# Altium PCB LAY-90818_A.brd.PcbDoc (part 5 of 6)
Units mil, origin at the board's own origin, x right, y up, seen from the top; angles counter-clockwise.
Board outline 4645.67 x 2165.35 mil, 4 copper layers (TOP, GND, POWER, BOTTOM), stack 60.45 mil thick; 414 components, 348 nets, 1441 pads, 720 vias.
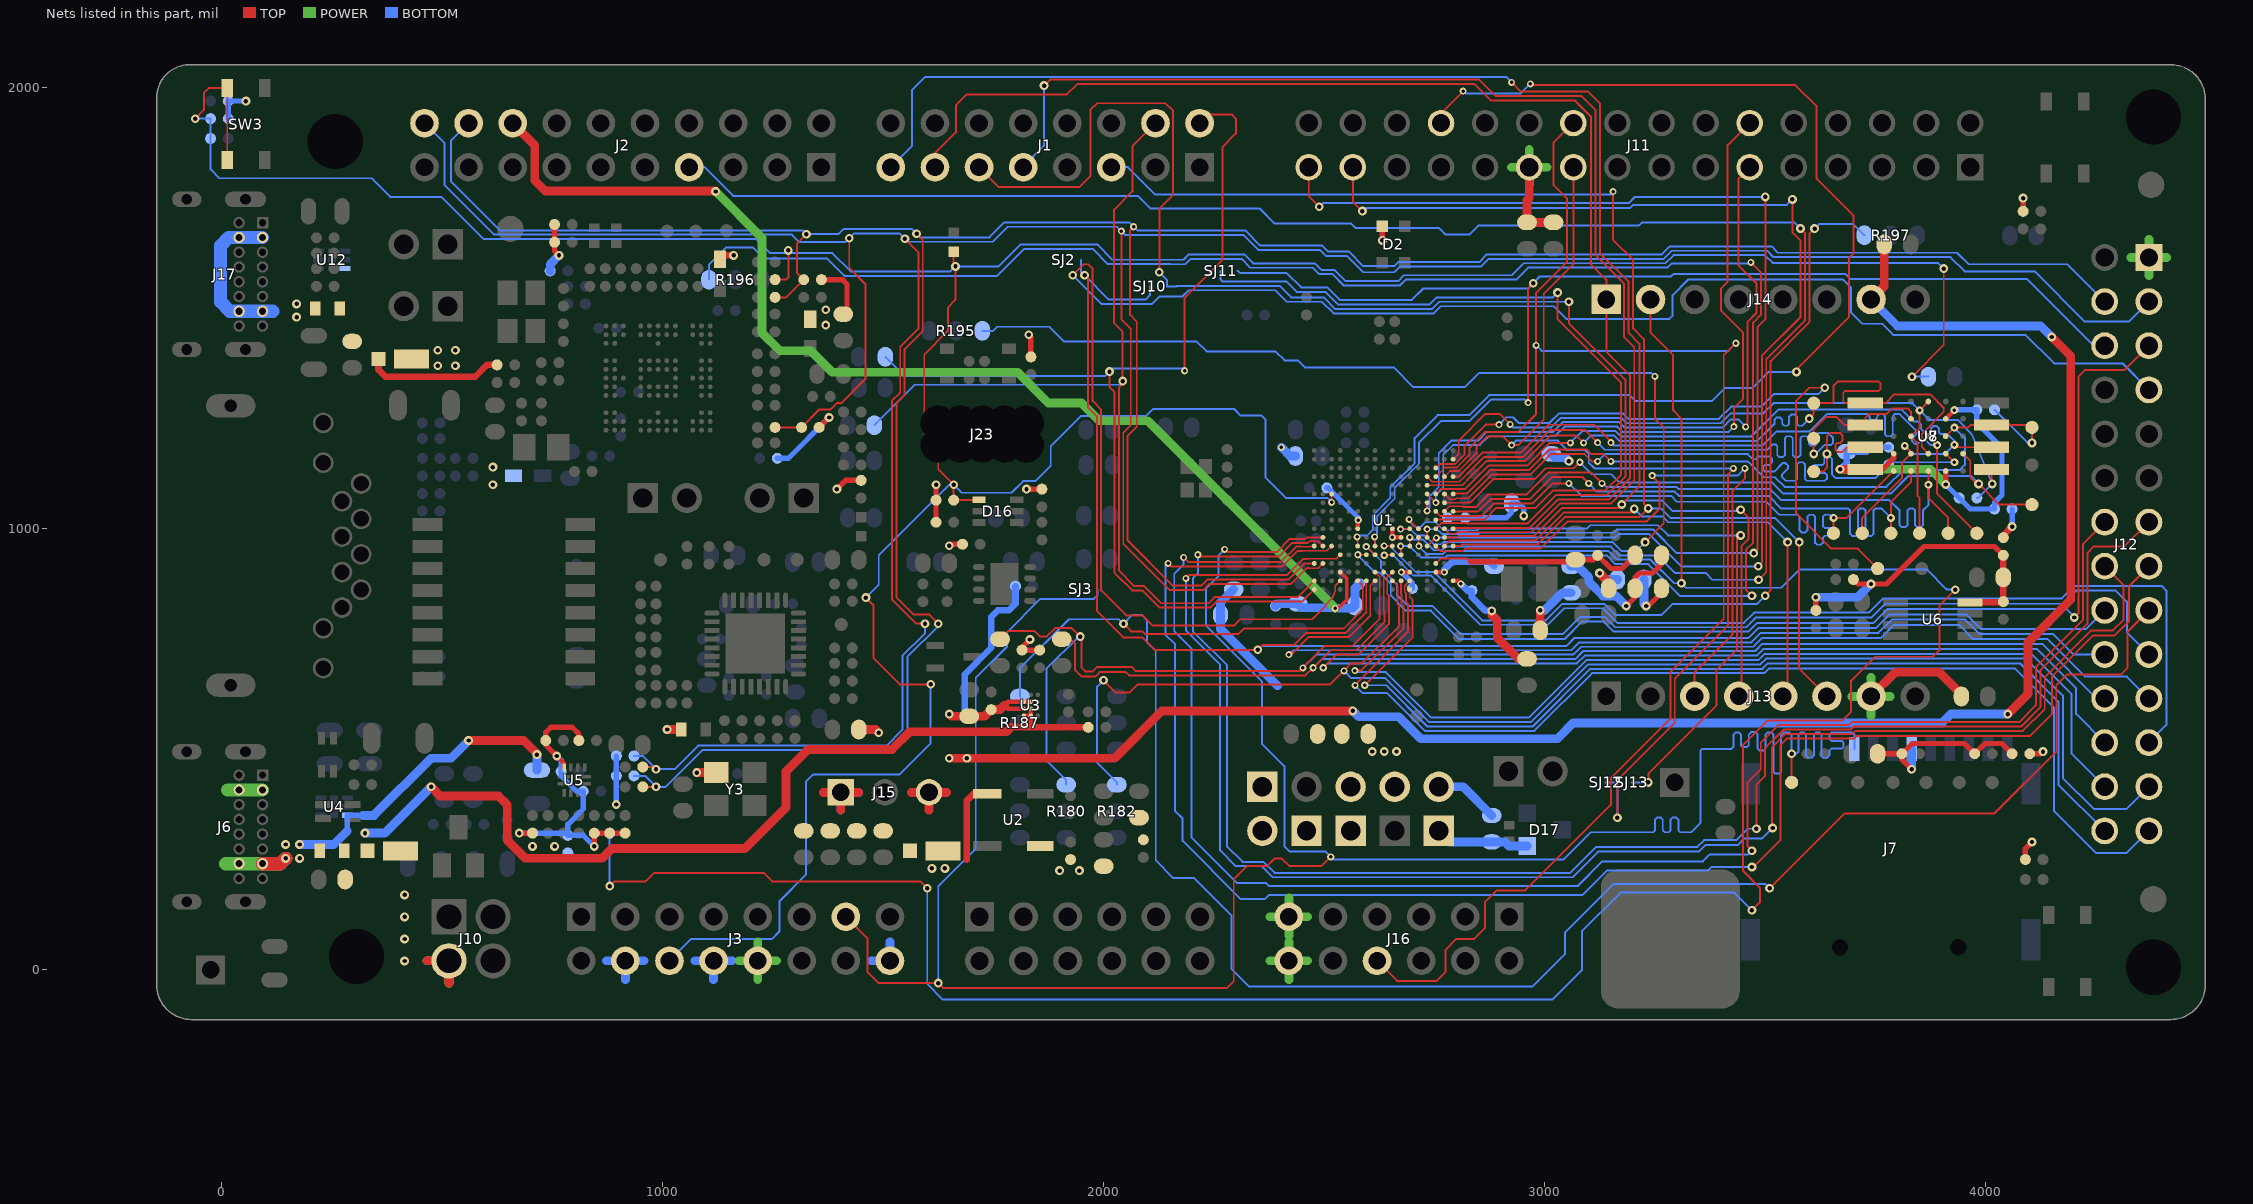
[diagram p7: the nets of this part, all layers, seen from the top]

## Via types
v1: diameter 20, hole 10, TOP to BOTTOM, 483 vias
v2: diameter 16, hole 8, TOP to BOTTOM, 215 vias
v3: diameter 18, hole 8, TOP to BOTTOM, 13 vias
v4: diameter 20, hole 10.1, TOP to BOTTOM, 9 vias

## Nets (pads, with @x,y where several pads share a name; then routed paths per layer and width w, separated by ;. In a path a pad name is that pad's centre, name@x,y a point inside that pad or via, vN(x,y) a via of type N, cw(c..) or ccw(c..) an arc to the next point about the centre after c; other vN are vias at no path point) (continued)
P2_7/PWM1_B0: J3.13 J7.1 SJ3.3 TP23.1 U1.L2 | length 6002.2
  TOP w4: 2445,977 2457,977 2460.63,980.63 U1.L2@2497.2,980.63
  TOP w4.4: J3.13@1415.5,120.5 1465,71 1465,-5 1490,-30 v1(1625,-30) 1636,-41 2279.86,-41 2295,-25.86 2295,205 2325,235 2370,235 2387.4,252.4 2404.31,252.4 2421.71,235 2493.8,235 v2(2515,256.2) ; v2(2274.43,953.2) 2275.29,953.2 2281.49,947 2392,947 2422,977 2445,977 ; TP23.1@3560,425 v1(3560,490)
  BOTTOM w4.4: v1(1625,-30) 1625,189.14 1710,274.14 1710,662.22 1781,733.22 1781,765.56 1856.44,841 1978,841 1986.5,849.5 SJ3.3@1986.5,864 ; v2(2274.43,953.2) 2260,938.77 2260,892.5 2232.5,865 2232.5,780.56 2359.02,654.03 2359.02,512.98 2410,462 2410,280 2422,268 2503.2,268 v2(2515,256.2) 2521.2,250 3042.51,250 3104.51,312 3245.83,312 3250.23,316.4 3250.23,340.6 3254.63,345 3263.43,345 3267.83,340.6 3267.83,316.4 3272.23,312 3281.03,312 3285.43,316.4 3285.43,340.6 3289.83,345 3298.63,345 3303.03,340.6 3303.03,316.4 3307.43,312 3332.74,312 3353.2,332.46 3353.2,496.6 3357.6,501 3423.6,501 3428,505.4 3428,533.6 3432.4,538 3440.79,538 3445.19,533.6 3445.19,509.4 3449.59,505 3458.39,505 3462.79,509.4 3462.79,533.6 3468.19,539 3478.68,539 3483.08,534.6 3483.08,501.4 3487.48,497 3496.28,497 3500.68,501.4 3500.68,533.6 3505.08,538 3514.4,538 3518.8,533.6 3518.8,449.4 3523.2,445 3532,445 3536.4,449.4 3536.4,532.6 3541.8,538 3555.6,538 3560,533.6 v1(3560,490) 3570.94,490 3575.34,494.4 3575.34,533.6 3579.74,538 3588.54,538 3592.94,533.6 3592.94,485.34 3597.34,480.94 3605.14,480.94 3610.54,486.34 3610.54,533.6 3614.94,538 3623.74,538 3628.14,533.6 3628.14,485.34 3632.54,480.94 3640.34,480.94 3645.74,486.34 3645.74,497.23 3650.14,501.63 3673.6,501.63 3678,506.03 3678,514.83 3673.6,519.23 3650.14,519.23 3645.74,523.63 3645.74,533.6 3650.14,538 3697.73,538 3702.13,533.6 J7.1@3702.13,500.94
P2_8/FXIO_D16-FXIO_HDR: J12.13 U1.M2 | length 3684.4
  TOP w4: 2445,968 2463,968 2466.64,971.64 2486.5,971.64 U1.M2@2497.2,960.94
  TOP w4.4: v2(2213.8,941.2) 2218,937 2397,937 2428,968 2445,968 ; v1(3480,320) 3480,420 3500,440 3500,503.29 3541.71,545 3694.14,545 3700.94,551.8 4080.24,551.8 4124,595.56 4124,679 4231,786 4231,946 4245,960 4314.76,960 J12.13@4370,1015.24
  BOTTOM w4.4: v2(2213.8,941.2) 2213.8,898.8 2202.5,887.5 2202.5,768.13 2279.32,691.31 2279.32,280.68 2315,245 2362.43,245 2387.43,220 3057.77,220 3116.77,279 3346.41,279 3361.41,294 3434.66,294 3460.66,320 v1(3480,320)
P2_9/FXIO_D17-FXIO_HDR: J12.14 U1.M1 | length 3725.2
  TOP w4: 2447.96,959.5 2469.5,959.5 2470.94,960.94 U1.M1@2477.52,960.94
  TOP w4.4: v2(2181.4,935) 2191.4,925 2401.82,925 2436.32,959.5 2447.96,959.5 ; v1(3470,270) 3460,280 3460,425 3490,455 3490,515 3529.99,555 3690,555 3696.8,561.8 4076.09,561.8 4114,599.71 4114,686.43 4221,793.43 4221,966.24 J12.14@4270,1015.24
  BOTTOM w4.4: v2(2181.4,935) 2181.4,919.65 2160.1,898.35 2160.1,768.1 2198.93,729.26 2198.93,300.78 2302.92,196.8 2368.2,196.8 2375,190 3074.44,190 3130.44,246 3358.67,246 3374.67,262 3462,262 v1(3470,270)
P2_10/FXIO_D18-FXIO_HDR: J12.15 U1.M3 | length 3820.7
  TOP w4: 2451.43,950.24 2506.19,950.24 U1.M3@2516.89,960.94
  TOP w4.4: v2(2146.3,921.61) 2152.91,915 2404.54,915 2439.78,950.24 2451.43,950.24 ; v1(3470,233.2) 3473.2,233.2 3535,295 3535,510 3550,525 3702.43,525 3707.43,530 4100,530 4150,580 4150,665 4243,758 4292,758 4325,791 4325,870.24 J12.15@4370,915.24
  BOTTOM w4.4: v2(2146.3,921.61) 2140.1,915.41 2140.1,759.81 2162,737.91 2162,360.14 2178.93,343.21 2178.93,292.5 2311.03,160.4 2365.4,160.4 2375,170 3086,170 3141,225 3370,225 3378.2,233.2 v1(3470,233.2)
P2_11/FXIO_D19: J12.16 U1.N4 | length 3628.4
  TOP w4: 2461.11,932.07 2461.31,932.27 2527.58,932.27 U1.N4@2536.57,941.26
  TOP w4.4: v2(2186.3,887.5) 2193.8,895 2415,895 2452.07,932.07 2461.11,932.07 ; v1(3516.8,321.72) 3515,323.52 3515,504.14 3545.85,535 3698.28,535 3705.09,541.8 4084.38,541.8 4134,591.42 4134,664 4239.57,769.57 4288.57,769.57 4313,794 4313,872.24 J12.16@4270,915.24
  BOTTOM w4.4: v2(2186.3,887.5) 2186.3,770.18 2264.24,692.24 2264.24,270.76 2300,235 2358.29,235 2383.29,210 3063.33,210 3121.33,268 3349.55,268 3364.55,283 3437.8,283 3453,298.2 3493.28,298.2 v1(3516.8,321.72)
P3_0/FLEXSPI0_A_SS0_B: R58.2 TP12.1 U1.B17 U7.A3 U7.C2 U8.1 | length 1837.8
  TOP w4: U1.B17@2792.48,1157.8 2805,1170.32 2805,1200
  TOP w4.4: 2805,1200 2865.62,1260.62 2897.66,1260.62 v2(2921.48,1236.8) ; TP12.1@3850,990 3850,1070 3845,1075 3845,1195.63 U7.C2@3830.63,1210 3850,1229.37 v3(3850,1268.74) U7.A3@3870,1288.74 ; U8.1@4013,1135 4013,1104 v1(4015,1102)
  BOTTOM w4.4: v2(2921.48,1236.8) 2928.28,1230 3015,1230 3036.8,1251.8 3173.28,1251.8 3185.68,1239.4 3399.26,1239.4 3421.86,1262 3496,1262 3519,1285 3833.74,1285 v3(3850,1268.74) 3871.86,1246.88 3936.18,1246.88 3968.29,1214.77 v1(4015,1102) 3983,1070 R58.2@3980,1070
P3_1/FLEXSPI0_A_SS1_B: TP31.1 U1.C15 | length 1559.2
  TOP w4: U1.C15@2753.11,1138.11 2762.1,1147.1 2796.91,1147.1 2818.53,1168.71 2818.53,1188.53
  TOP w4.4: 2818.53,1188.53 2866.2,1236.2 v2(2896.48,1236.2) ; v1(3635,1320) 3600,1320 3570,1290 3570,1035 3650,955 3710,955 TP31.1@3755,910
  BOTTOM w4.4: v2(2896.48,1236.2) 2913.28,1253 2928.19,1253 2941.19,1240 3010.86,1240 3032.85,1261.99 3177.24,1261.99 3189.83,1249.4 3395.11,1249.4 3422.72,1277 3491.14,1277 3520.14,1306 3621,1306 v1(3635,1320)
P3_2/FC7_I2C_SDA: J11.20 J16.8 U1.D15 | length 3423.9
  TOP w4: U1.D15@2753.11,1118.43 2753.43,1118.43 2774.1,1139.1 2800.69,1139.1 2825.79,1164.2 2825.79,1164.91
  TOP w4.4: J16.8@2620,20.5 2665.5,-25 2755,-25 2775,-5 2775,45 2800,70 2840,70 2865,95 2865,154.14 2890.86,180 2955.86,180 3150,374.14 3150,434.26 3285,569.26 3285,675 3406.06,796.06 3406.06,1393.1 v2(3433.8,1420.84) ; 2825.79,1164.91 2830,1169.12 2830,1184.14 2865.66,1219.8 2939.8,1219.8 2980.41,1260.41 v2(2980.41,1416.2) 2980.41,1421.99 2980.38,1535.38 3051,1606 3051,1749 3020,1780 3020,1875 J11.20@3065,1920
  BOTTOM w4.4: v2(2980.41,1416.2) 2993.11,1403.5 3416.46,1403.5 v2(3433.8,1420.84)
P3_3/FC7_I2C_SCL: J11.19 SJ12.1 U1.D16 | length 2453.2
  TOP w4: U1.D16@2772.8,1118.43 2785.47,1131.1 2804.96,1131.1 2825,1151.14 2825,1151.39
  TOP w4.4: 2825,1151.39 2845,1171.39 2845,1185 2869.8,1209.8 2905.2,1209.8 v2(2925,1190) 2940,1190 2997.9,1247.9 2997.9,1532.9 3065,1600 J11.19@3065,1820 ; v1(3165,345) 3165,430 3295,560 3295,660 3416.06,781.06 3416.06,1124.26 3427.8,1135.99 v2(3427.8,1137)
  BOTTOM w4.4: v2(2925,1190) 2935,1200 3030,1200 3051.47,1178.53 3091.47,1178.53 3100,1170 3100,1150 3113,1137 v2(3427.8,1137) ; SJ12.1@3138,425 3160.6,425 3165,420.6 v1(3165,345)
P3_4/EZH_LCD_D4_CAMERA_D4: J11.12 U1.F14 | length 1583
  TOP w4: U1.F14@2733.43,1079.06 v2(2753.12,1059.37)
  TOP w4.4: v2(3428.91,1232) 3428.91,1273.91 3450,1295 3450,1445 3400.34,1494.66 3400.34,1545.34 3415,1560 3415,1870 J11.12@3465,1920
  BOTTOM w4: v2(2753.12,1059.37) 2753.12,1076.12 2770,1093 2770,1167.57 2792.43,1190 2853.34,1190 2873.34,1210
  BOTTOM w4.4: 2873.34,1210 3023.29,1210 3045.09,1231.8 3165,1231.8 3177.4,1219.4 3416.31,1219.4 v2(3428.91,1232)
P3_5/EZH_LCD_D5_CAMERA_D5: J11.11 U1.G14 | length 1531.2
  TOP w4: v2(2733.43,1040.87) U1.G14@2733.43,1059.37
  TOP w4.4: v2(3455.8,1231.2) 3460,1235.4 3460,1469.14 3480.34,1489.49 3480.34,1556.66 3440,1597 3440,1795 J11.11@3465,1820
  BOTTOM w4: v2(2733.43,1040.87) 2739.12,1046.56 2739.12,1074.12 2760,1095 2760,1171.71 2788.29,1200
  BOTTOM w4.4: 2788.29,1200 2849.2,1200 2869.2,1220 3019.14,1220 3040.94,1241.8 3169.14,1241.8 3181.54,1229.4 3403.4,1229.4 3422.2,1248.2 3438.8,1248.2 v2(3455.8,1231.2)
P3_6/FLEXSPI0_A_DQS: TP8.1 U1.D17 U7.C3 | length 1632.5
  TOP w4: U1.D17@2792.48,1118.43 2804.77,1118.43 2825.67,1139.33
  TOP w4.4: 2825.67,1139.33 2859.74,1173.4 2946.87,1173.4 3009.47,1236 3112.2,1236 3150,1198.2 v2(3150,1195.6) ; U7.C3@3870,1210 v3(3890,1190) 3890,1080 TP8.1@3980,990
  BOTTOM w4.4: v2(3150,1195.6) 3156.2,1189.4 3494.4,1189.4 3526.06,1221.06 3601.06,1221.06 3640,1260 3732.09,1260 3736.49,1255.6 3736.49,1251.4 3740.89,1247 3749.69,1247 3754.09,1251.4 3754.09,1255.6 3758.49,1260 3767.23,1260 3771.63,1255.6 3771.63,1214.4 3776.03,1210 3784.83,1210 3789.23,1214.4 3789.23,1255.6 3793.63,1260 3804.96,1260 3843.31,1221.65 3843.31,1215.42 3833.05,1205.17 3833.05,1198.95 3839.28,1192.72 3845.5,1192.72 3855.76,1202.98 3861.98,1202.98 3874.96,1190 v3(3890,1190)
P3_7/FLEXSPI0_A_SCLK: TP18.1 U1.D14 U7.B2 U8.6 | length 1595.5
  TOP w4: U1.D14@2733.43,1118.43 2744.93,1106.93 2806.93,1106.93 2825,1125
  TOP w4.4: 2825,1125 2863.4,1163.4 2951.02,1163.4 3011.62,1224 3091.6,1224 v2(3120,1195.6) ; v1(3610,1170) TP18.1@3610,1205 3610,1225.74 3637.46,1253.2 3661.8,1253.2 3680,1235 U8.6@3727,1235 3727,1252 3735,1260 3775,1260 3788,1273 3823.23,1273 3830.63,1265.6 U7.B2@3830.63,1249.37
  BOTTOM w4.4: v2(3120,1195.6) 3136.2,1179.4 3505,1179.4 3517.19,1191.59 3523.41,1191.59 3527.35,1187.65 3527.35,1167.35 3531.69,1163 3540.49,1163 3544.89,1167.4 3544.89,1205.6 3549.29,1210 3558.09,1210 3562.49,1205.6 3562.49,1167.4 3566.89,1163 3575.69,1163 3580.09,1167.4 3580.09,1205.6 3584.49,1210 3594.51,1210 3598.91,1205.6 3598.91,1193.4 3603.31,1189 3612.11,1189 3616.51,1193.4 3616.51,1212.5 3620.91,1216.9 3643.1,1216.9 3654.02,1205.98 3654.02,1194.77 3649.62,1190.37 3634.63,1190.37 3614.26,1170 v1(3610,1170)
P3_8/FLEXSPI0_A_DATA0: TP16.1 U1.E14 U7.D3 U8.5 | length 1755.2
  TOP w4: U1.E14@2733.43,1098.74 2812.88,1098.74 2825,1110.86
  TOP w4.4: 2825,1110.86 2867.54,1153.4 2955.16,1153.4 3013.76,1212 3070.91,1212 v2(3088.18,1194.73) ; v1(3600,1250) 3610,1260 TP16.1@3610,1285 3650.6,1285 3655,1289.4 3655,1324.6 3664.4,1334 3757.6,1334 3762,1329.6 3762,1317.4 3757.6,1313 3681.4,1313 3677,1308.6 3677,1289.4 3681.4,1285 U8.5@3727,1285 3773,1285 3793,1305 3874,1305 3905,1274 3905,1265 3855,1215 3855,1185.63 U7.D3@3870,1170.63
  BOTTOM w4.4: v2(3088.18,1194.73) 3105.26,1211.8 3156.71,1211.8 3169.11,1199.4 3482.38,1199.4 3521.18,1238.2 3521.18,1247.6 3525.57,1252 3534.38,1252 3538.78,1247.6 3538.78,1238.2 3543.18,1233.8 3549.85,1233.8 3554.25,1238.2 3554.25,1254.6 3558.65,1259 3567.45,1259 3571.85,1254.6 3571.85,1238.2 3576.25,1233.8 3583.8,1233.8 v1(3600,1250)
P3_9/FLEXSPI0_A_DATA1: TP15.1 U1.F15 U7.D2 U8.2 | length 1801.7
  TOP w4: U1.F15@2753.11,1079.06 2764.61,1090.56 2819.72,1090.56 2824.14,1094.99
  TOP w4.4: 2824.14,1094.99 2872.56,1143.4 2960.2,1143.4 3011.53,1194.73 v2(3058.18,1194.73) ; TP15.1@3720,990 3720,1025 3810,1115 3810,1150 U7.D2@3830.63,1170.63 3830.63,1174.18 v3(3816.5,1188.31) ; v3(3929.05,1190.32) 3934.37,1185 U8.2@4013,1185
  BOTTOM w4.4: v2(3058.18,1194.73) 3085.26,1221.8 3160.85,1221.8 3173.26,1209.4 3468.83,1209.4 3530.43,1271 3809,1271 3836.31,1243.68 3846.31,1243.68 3853.76,1236.24 3853.76,1226.24 3865.34,1214.66 3871.83,1214.66 3876.23,1219.06 3876.23,1228.6 3880.63,1233 3889.43,1233 3893.83,1228.6 3893.83,1219.06 3898.23,1214.66 3914.34,1214.66 3929.05,1199.95 v3(3929.05,1190.32) 3908.73,1170 3834.81,1170 v3(3816.5,1188.31)
P3_10/FLEXSPI0_A_DATA2: R59.2 TP13.1 U1.F17 U7.C4 U8.3 | length 1712
  TOP w4: U1.F17@2792.48,1079.06 2793.42,1080 2823.3,1080
  TOP w4.4: 2823.3,1080 2876.7,1133.4 2964.35,1133.4 3010.95,1180 3095,1180 3105.6,1169.4 3133.8,1169.4 v2(3150,1153.2) ; U7.C4@3909.37,1210 v3(3929.05,1229.68) 3959.69,1229.69 3965,1235 U8.3@4013,1235 4100,1235 TP13.1@4105,1230 v1(4105,1195)
  BOTTOM w4.4: v2(3150,1153.2) 3460.51,1153.2 3496.71,1117 3522,1117 3544,1095 3775,1095 3813.75,1133.75 3941.75,1133.75 3953,1145 3953,1205.73 v3(3929.05,1229.68) ; R59.2@4020,1270 4095,1195 v1(4105,1195)
P3_11/FLEXSPI0_A_DATA3: R60.2 TP14.1 U1.F16 U7.D4 U8.7 | length 1879.4
  TOP w4: U1.F16@2772.8,1079.06 2784.49,1067.37 2797.37,1067.37 2799.37,1069.37 2825,1069.37
  TOP w4.4: 2825,1069.37 2826.81,1069.37 2880.84,1123.4 2968.49,1123.4 3015.09,1170 3090,1170 3106.8,1153.2 v2(3120,1153.2) ; TP14.1@3610,1130 3632,1130 3640,1138 v1(3640,1170) 3640,1209.6 3647.35,1216.95 3670.6,1216.95 3675,1212.55 3675,1199.4 3670.6,1195 3663.4,1195 3659,1190.6 3659,1179 3663.58,1174.42 3674.42,1174.42 3685,1185 U8.7@3727,1185 ; U7.D4@3909.37,1170.63 v3(3929.05,1150.95)
  BOTTOM w4.4: v2(3120,1153.2) 3136.2,1169.4 3460.6,1169.4 3472.18,1157.82 3478.4,1157.82 3484.68,1164.1 3510.9,1164.1 3515,1160 3515,1150 3510.02,1145.02 3500,1145.02 3495.6,1140.62 3495.6,1134.4 3500,1130 3520.15,1130 3539.46,1149.32 3545.68,1149.32 3551.91,1143.09 3551.91,1136.87 3538.63,1123.59 3538.63,1117.37 3547,1109 3567.96,1109 3572.36,1113.4 3572.36,1146.6 3576.76,1151 3585.56,1151 3589.96,1146.6 3589.96,1113.4 3594.36,1109 3635.62,1109 3640.02,1113.4 3640.02,1122.63 3635.62,1127.03 3611.4,1127.03 3607,1131.43 3607,1140.23 3611.4,1144.63 3629.6,1144.63 3634,1149.03 3634,1164 v1(3640,1170) 3651.8,1158.2 3651.8,1123.2 3660,1115 3750,1115 R60.2@3780,1145 3785.95,1150.95 v3(3929.05,1150.95)
P3_12/FLEXSPI0_A_DATA4: TP17.1 U1.G16 U7.D5 | length 1528.6
  TOP w4: U1.G16@2772.8,1059.37 2825,1059.37
  TOP w4.4: 2825,1059.37 2830.96,1059.37 2884.99,1113.4 2978.4,1113.4 3002.4,1137.4 3066.4,1137.4 v2(3080,1151) ; U7.D5@3948.74,1170.63 3965,1154.37 3965,1117 3980,1102 v1(3984,1102) 4031,1055 TP17.1@4105,1055
  BOTTOM w4.4: v2(3080,1151) 3107.2,1123.8 3151.2,1123.8 3170.4,1104.6 3516.4,1104.6 3541,1080 3785,1080 3825,1120 3966,1120 v1(3984,1102)
P3_13/FLEXSPI0_A_DATA5: TP11.1 U1.H16 U7.E3 | length 1525.3
  TOP w4: U1.H16@2772.8,1039.69 2784.3,1051.19 2813.81,1051.19 2815.63,1049.37 2825,1049.37
  TOP w4.4: 2825,1049.37 2843.37,1049.37 2871.5,1077.5 2958.5,1077.5 3008.4,1127.4 3105.8,1127.4 v2(3130,1103.2) ; U7.E3@3870,1131.26 v3(3870,1100) 3870,1070 3915,1025 TP11.1@3915,990
  BOTTOM w4.4: v2(3130,1103.2) 3132.4,1103.2 3141,1094.6 3299.54,1094.6 3304.14,1090 3512,1090 3537,1065 3781.4,1065 3804.8,1041.6 3804.8,1008.4 3809.2,1004 3818,1004 3822.4,1008.4 3822.4,1041.6 3826.8,1046 3835.6,1046 3840,1041.6 3840,1008.4 3844.4,1004 3853.2,1004 3857.6,1008.4 3857.6,1041.6 3870,1054 v3(3870,1100)
P3_14/FLEXSPI0_A_DATA6: TP10.1 U1.H17 U7.E2 | length 1450.8
  TOP w4: U1.H17@2792.48,1039.69 2792.8,1039.37 2849.37,1039.37 2854.43,1044.42
  TOP w4.4: 2854.43,1044.42 2877.5,1067.5 2966.39,1067.5 3016.29,1117.4 3085.8,1117.4 v2(3100,1103.2) ; TP10.1@3785,990 v3(3785,1025) 3785,1060 3830.63,1105.63 U7.E2@3830.63,1131.26
  BOTTOM w4.4: v2(3100,1103.2) 3118.6,1084.6 3295.4,1084.6 3305.73,1074.27 3508.73,1074.27 3537,1046 3688.4,1046 3692.8,1041.6 3692.8,988.4 3697.2,984 3706,984 3710.4,988.4 3710.4,1041.6 3714.8,1046 3723.6,1046 3728,1041.6 3728,988.4 3732.4,984 3741.2,984 3745.6,988.4 3745.6,1041.6 3750,1046 3764,1046 v3(3785,1025)
P3_15/FLEXSPI0_A_DATA7: TP9.1 U1.H15 U7.E1 | length 1434.3
  TOP w4: U1.H15@2753.11,1039.69 2763.81,1028.99 2856.99,1028.99 2861.06,1033.06
  TOP w4.4: 2861.06,1033.06 2885.5,1057.5 2972.5,1057.5 3018.2,1103.2 v2(3055,1103.2) ; TP9.1@3655,990 v3(3655,1025) 3685,1025 U7.E1@3791.26,1131.26
  BOTTOM w4.4: v2(3055,1103.2) 3083.6,1074.6 3286.8,1074.6 3300,1061.4 3502.6,1061.4 3532,1032 3573.57,1032 3577.97,1027.6 3577.97,996.4 3582.37,992 3591.17,992 3595.57,996.4 3595.57,1027.6 3599.97,1032 3608.77,1032 3613.17,1027.6 3613.17,968.4 3617.57,964 3626.37,964 3630.77,968.4 3630.77,979.99 3635.17,984.39 3658.6,984.39 3663,988.79 3663,997.59 3658.6,1001.99 3635.17,1001.99 3630.77,1006.39 3630.77,1027.6 3635.17,1032 3648,1032 v3(3655,1025)
P3_16/SAI1_TX_BCLK: SJ11.1 U1.J15 | length 1754.2
  TOP w4: U1.J15@2753.11,1020 2754.1,1020.99 2864,1020.99 2866.43,1023.42
  TOP w4.4: 2866.43,1023.42 2890.51,1047.5 2979.5,1047.5 3019,1087 3137.74,1087 3173.2,1122.46 3173.2,1331.8 3029.37,1475.63 v1(3029.37,1535.63)
  BOTTOM w4.4: SJ11.1@2265,1585 2265,1565.4 2269.4,1561 2414,1561 2437.6,1537.4 2502.66,1537.4 2531.73,1508.33 2738.33,1508.33 2755,1525 3018.74,1525 v1(3029.37,1535.63)
P3_17/SAI1_TX_FS: J1.11 SJ10.3 U1.K15 | length 2919.8
  TOP w4: U1.K15@2753.11,1000.31 2765.79,1012.99 2823.81,1012.99 2824.31,1012.49
  TOP w4.4: J1.11@1717.5,1820 1762.5,1775 1945,1775 1970,1800 1970,1950 1985,1965 2140,1965 2157.4,1947.6 2157.4,1757.4 2126.25,1726.25 v1(2126.25,1582) ; 2824.31,1012.49 2961.77,1012.49 3026.28,1077 3141.88,1077 3183.2,1118.32 3183.2,1338.51 3055,1466.71 v1(3055,1515)
  BOTTOM w4.4: v1(2126.25,1582) 2143.5,1564.75 SJ10.3@2143.5,1550 2164.73,1550 2165.73,1551 2399,1551 2425,1525 2498.99,1525 2525.66,1498.33 2744,1498.33 2760.67,1515 v1(3055,1515)
P3_18/SAI1_RX_BCLK: J1.9 U1.K16 | length 2851
  TOP w4: U1.K16@2772.8,1000.31 2784.3,988.81 2798.81,988.81 2802.85,992.85 2825.67,992.85 2826.17,992.35 2969.92,992.35
  TOP w4.4: v1(1865,2005) 1878.6,2018.6 2851.4,2018.6 2888.8,1981.2 3083.8,1981.2 3115,1950 3115,1621.19 3180.34,1555.85 3180.34,1434.66 3203.2,1411.8 3203.2,1110.03 3150.17,1057 3034.57,1057 2969.92,992.35
  BOTTOM w4.4: J1.9@1817.5,1820 1817.5,1822.5 1865,1870 v1(1865,2005)
P3_19/ME_PWM: J1.13 J14.1 U1.K17 | length 2955.5
  TOP w4: U1.K17@2792.48,1000.31 2794.02,1001.85 2962.95,1001.85
  TOP w4.4: J1.13@1617.5,1820 1617.5,1851.64 1665,1899.14 1665,1960 1690,1985 1916.71,1985 1940.31,2008.6 2841.4,2008.6 2878.8,1971.2 3068.8,1971.2 3105,1935 3105,1600 3140.04,1564.96 J14.1@3140.04,1520.11 3140.04,1401.67 3193.2,1348.51 3193.2,1114.17 3146.03,1067 3030.43,1067 2965.28,1001.85 2962.95,1001.85
P3_20/ME_FC6_SPI_MOSI: J1.5 J13.6 U1.M17 | length 3145.7
  TOP w4: U1.M17@2792.48,960.94 2809.06,960.94 2812.93,964.81 2825,964.81
  TOP w4.4: 2825,964.81 2984.81,964.81 3047,1027 3215.6,1027 v1(3235,1046.4) 3225,1056.4 3225,1430 3200.34,1454.66 3200.34,1609.66 3155.2,1654.8 v2(3155.2,1764.8) ; v1(3577.1,970) 3577.1,683.05 J13.6@3640.04,620.11
  BOTTOM w4.4: J1.5@2017.5,1820 2055,1820 2116.4,1758.6 3150.6,1758.6 3155.2,1763.2 v2(3155.2,1764.8) ; v1(3235,1046.4) 3263.6,1046.4 3285,1025 3521.74,1025 3576.74,970 v1(3577.1,970)
P3_21/ME_FC6_SPI_CLK: J1.15 J13.4 U1.L16 | length 3914.6
  TOP w4: U1.L16@2772.8,980.63 2801.94,980.63 2805.62,984.31 2821.33,984.31 2822.29,983.35 2825,983.35
  TOP w4.4: 2825,983.35 2975.06,983.35 3038.72,1047 3165.91,1047 3174.11,1055.2 v1(3174.8,1055.2) 3174.8,1055.89 3215,1096.09 3215,1420 3190.34,1444.66 3190.34,1559.99 3125,1625.33 3125,1965 3098.8,1991.2 2946.2,1991.2 v2(2925,2012.4) ; J13.4@3440.04,620.11 3446.06,626.12 3446.06,961.06 3462.46,977.46 3462.46,1025 v1(3444.26,1043.2)
  BOTTOM w4.4: J1.15@1517.5,1820 1565,1867.5 1565,1995 1595,2025 2912.4,2025 v2(2925,2012.4) ; v1(3174.8,1055.2) 3174.8,1055.89 3183.51,1064.6 3265.4,1064.6 3290,1040 3441.06,1040 v1(3444.26,1043.2)
P3_22/ME_FC6_SPI_MISO: J13.5 U1.M16 | length 1198.7
  TOP w4: U1.M16@2772.8,960.94 2784.49,972.63 2807.63,972.63 2808.81,973.81 2827.34,973.81
  TOP w4.4: 2827.34,973.81 2979.67,973.81 3042.86,1037 3194.91,1037 v1(3203.11,1045.2) ; J13.5@3540.04,620.11 3551,631.06 v1(3551,970)
  BOTTOM w4.4: v1(3203.11,1045.2) 3220.11,1028.2 3266.8,1028.2 3280,1015 3506,1015 v1(3551,970)
P3_23/ME_FC6_SPI_CS: J13.3 U1.M15 | length 1414.2
  TOP w4: U1.M15@2753.11,960.94 2764.61,949.44 2799.43,949.44 2799.89,949.91 2814.91,949.91 2820.81,955.81 2825,955.81
  TOP w4.4: 2825,955.81 2990.81,955.81 3052,1017 3232,1017 3260,1045 3260,1103.8 3244,1119.8 v2(3244,1120.8) ; J13.3@3340.04,620.11 3340.04,675.04 3426.06,761.06 3426.06,1086.06 3453.8,1113.8 v2(3453.8,1137)
  BOTTOM w4.4: v2(3244,1120.8) 3437.6,1120.8 v2(3453.8,1137)
P3V3: C58.1 C70.1 C83.1 C104.1 C105.1 D2.1 J3.4 J3.8 J11.21 J12.1 J13.7 J16.11 J16.12 J24.1 L5.1 L9.1 L10.1 L12.1 R1.1 R2.1 R3.1 R4.1 R24.1 R25.2 R26.1 R32.1 R108.1 R109.1 R114.1 R124.1 R140.1 R141.1 R144.1 R145.1 R146.1 R148.1 R149.1 R188.1 R190.2 R198.1 R200.1 R201.1 R202.1 R203.1 R204.1 Y3.4 | length 2925.6
  TOP w12: R114.1@755,1690 R108.1@755,1650 755,1630 v1(765,1620) ; R140.1@1355,1230 v1(1377.5,1252.5) ; R141.1@1360,1565 1407.51,1565 1418,1554.51 1418,1495.2 C83.1@1409.7,1486.9 ; v1(1395,1090) 1415,1110 R109.1@1450,1110 ; R145.1@1620,1015 R146.1@1620,1065 v1(1620,1100) ; v1(1650,961.8) 1651.8,961.8 1655,965 R198.1@1680,965 ; v1(1825,1090) R144.1@1860,1090 ; v1(1830,1440) 1835,1435 R188.1@1835,1390 ; v1(1832.67,749.06) 1815,731.39 R32.1@1815,725 R26.1@1855,725 ; D2.1@2631.4,1686.3 2631.4,1654.6 v1(2632,1654) ; R2.1@4085,1720 v1(4085,1750) ; R1.1@4090,250 4090,275 v1(4105,290) ; R202.1@4100,490 4125,490 v1(4130,495)
  TOP w15: L10.1@1130,1611.28 1131,1611.28 1139.72,1620 v1(1161,1620) ; R201.1@4040,980 4040,985 v1(4060,1005)
  TOP w20: v1(1010,545) L5.1@1042.4,545 ; v1(1077.19,447.4) Y3.4@1121.69,447.4 ; R190.2@1445,545 1482.5,545 v1(1490,537.5) ; J11.21@2965,1820 2965,1750 2960,1745 C104.1@2960,1695 C105.1@3020,1695 ; J13.7@3740.04,620.11 3794.94,675 3895,675 3945,625 C70.1@3945,620
  POWER w20: 2377.5,20.5 J16.12@2420,20.5 ; 2377.5,120.5 J16.11@2420,120.5 ; 2420,-22 J16.12@2420,20.5 ; 2420,63 J16.12@2420,20.5 ; 2420,78 J16.11@2420,120.5 ; 2420,163 J16.11@2420,120.5 ; 2462.5,20.5 J16.12@2420,20.5 ; 2462.5,120.5 J16.11@2420,120.5 ; 2925,1820 J11.21@2965,1820 ; 2965,1780 J11.21@2965,1820 ; 2965,1860 J11.21@2965,1820 ; 3005,1820 J11.21@2965,1820 ; 3696.54,620.11 J13.7@3740.04,620.11 ; 3740.04,576.6 J13.7@3740.04,620.11 ; 3740.04,663.61 J13.7@3740.04,620.11 ; 3783.55,620.11 J13.7@3740.04,620.11 ; 4329.5,1615.24 J12.1@4370,1615.24 ; 4370,1574.73 J12.1@4370,1615.24 ; 4370,1655.74 J12.1@4370,1615.24 ; 4410.5,1615.24 J12.1@4370,1615.24
  BOTTOM w12: R3.1@15,1930 R4.1@15,1970 v1(55,1970) ; v1(895,375) R148.1@895,440 R149.1@895,485 ; v1(1077.19,447.4) 1079.6,445 C58.1@1130,445 ; R124.1@1260,1160 1285,1160 v1(1377.5,1252.5) ; v1(4060,1005) R200.1@4060,1045
  BOTTOM w20: R204.1@745,1585 745,1600 v1(765,1620) ; 873,20.5 J3.4@915.5,20.5 ; 915.5,-22 J3.4@915.5,20.5 ; 958,20.5 J3.4@915.5,20.5 ; 1073,20.5 J3.8@1115.5,20.5 ; 1115.5,-22 J3.8@1115.5,20.5 ; 1158,20.5 J3.8@1115.5,20.5
  other v1: 705,280 755,280 615,1100 615,1140 1369.68,1461.87 1369.68,1496.87
P3V3_I3C: C44.1 C45.1 R51.2 R52.2 R201.2 U6.8 | length 736.1
  TOP w12: R51.2@3615,815 v1(3615,845) ; R52.2@3700,885 3710,875 v1(3740,875) 3775,875 3860,960 4020,960 R201.2@4040,940
  TOP w15: U6.8@3964.65,833.39 4038.39,833.39 C44.1@4040,835 C45.1@4040,890 R201.2@4040,940
  BOTTOM w20: v1(3615,845) 3710,845 v1(3740,875)
P3V3_MCU: D17.1 J24.2 J25.1 J26.1 J28.1 R16.1 R151.1 R152.1 | length 214.6
  BOTTOM w20: J28.1@2760,315 2785,290 R16.1@2880,290 2910,290 2919,281 D17.1@2960.5,281
P3V3_PTN: C41.1 R36.1 R37.1 R38.1 R39.1 R40.1 R41.1 R42.1 R203.2 U5.12 | length 738.6
  TOP w10: v1(760,485) 776.38,468.62 U5.12@776.38,458.54
  TOP w12: v1(675,310) R42.1@705,310 ; v1(760,485) 735,510 R41.1@735,520 735,538.5 746.5,550 795,550 810,535 R39.1@810,520 ; v1(845,280) R40.1@845,310 R36.1@880,310 R38.1@915,310
  BOTTOM w12: v1(675,310) 780,310 R203.2@785,305 ; v1(760,485) 770,475 C41.1@770,450 770,440 805,405 R37.1@820,405 820,365 785,330 R203.2@785,305 ; v1(845,280) 820,305 R203.2@785,305
P3V3_QSPI: C46.1 C47.1 R58.1 R59.1 R60.1 R200.2 U7.B4 U7.D1 U7.E4 U8.8 | length 1040.2
  TOP w10: U7.B4@3909.37,1249.37 v3(3929.05,1269.05)
  TOP w12: U8.8@3727,1135 3765.99,1135 3791.26,1160.27 U7.D1@3791.26,1170.63 ; v1(3909.37,1100.63) U7.E4@3909.37,1131.26
  TOP w20: v1(3670,1135) U8.8@3727,1135
  POWER w20: v1(3670,1135) 3875,1135 v1(3909.37,1100.63)
  BOTTOM w12: C47.1@3740,1185 R60.1@3780,1185 ; v1(3909.37,1100.63) R58.1@3940,1070 3965,1045 R200.2@4020,1045 4020,1060 4037,1077 4037,1183 3980,1240 R59.1@3980,1270 3930,1270 v3(3929.05,1269.05)
  BOTTOM w15: v1(3670,1135) 3685,1150 C46.1@3685,1175 3730,1175 C47.1@3740,1185
P3V3_SDHC: C42.1 C43.1 J7.4 R57.1 R202.2 | length 434
  TOP w12: C42.1@3755,490 C43.1@3810,490 ; v1(3832.05,455) 3810,477.05 C43.1@3810,490 ; R202.2@4060,490 4036.5,513.5 3998.5,513.5 R57.1@3975,490 3951.5,513.5 3833.5,513.5 C43.1@3810,490
  BOTTOM w20: v1(3832.05,455) J7.4@3832.05,500.94
P4_0/FC2_I2C_SDA-ARD_D18: J2.18 J12.4 R45.1 R141.2 R142.2 R148.2 U1.P1 | length 7464.8
  TOP w4.4: R45.1@955,415 v1(985,415) ; R142.2@1255,1525 1280,1525 R141.2@1320,1565 1305,1580 1305,1647.2 v1(1326,1668.2) ; v1(1575.8,1669.2) 1589.8,1655.2 1589.8,1448.37 1548.8,1407.37 1548.8,1303.8 1530,1285 1530,845 1569.7,805.3 1604.7,805.3 v1(1625,785) ; v2(2068.09,1685) 2060,1676.91 2060,1485 2075,1470 2075,1232 2054.42,1211.42 2054.42,973.58 2156.7,871.3 2221.44,871.3 2235.14,885 2419.09,885 2455.66,921.57 U1.P1@2477.52,921.57
  BOTTOM w4.4: J2.18@560,1920 520,1880 520,1788 631,1677 1317.2,1677 v1(1326,1668.2) 1398.2,1668.2 1410.18,1680.18 1564.82,1680.18 v1(1575.8,1669.2) 1584,1661 1741,1661 1775,1695 2058.09,1695 v2(2068.09,1685) 2076.49,1676.6 2321.08,1676.6 2355.62,1642.06 2495.34,1642.06 2508.23,1629.17 2555.72,1629.17 2589.09,1595.8 2659.23,1595.8 2668.43,1605 2851.92,1605 2869.12,1622.2 3265.66,1622.2 3284.05,1640.58 3514.42,1640.58 3528.89,1626.11 3935,1626.11 3961.11,1600 4185.24,1600 J12.4@4270,1515.24 ; R148.2@935,440 960,440 v1(985,415) 1007,415 1090.2,498.2 1516.29,498.2 1555.14,537.05 1555.14,709.51 1625,779.38 v1(1625,785)
P4_1/FC2_I2C_SCL-ARD_D19: J2.20 J12.3 R43.1 R140.2 R143.2 R149.2 U1.P2 | length 7991.3
  TOP w4: 2465.36,910.87 2486.5,910.87 U1.P2@2497.2,921.57
  TOP w4.4: R43.1@955,460 980,460 v1(985,455) ; R143.2@1255,1230 R140.2@1315,1230 1355.7,1270.7 1380.7,1270.7 1395,1285 1405,1285 1460,1340 1460,1555 1423.2,1591.8 v1(1423.2,1659) ; v1(1549.2,1657.6) 1579.8,1627 1579.8,1454.13 1538.8,1413.13 1538.8,1308.8 1520,1290 1520,840 1575,785 v1(1595,785) ; v2(2040,1675) 2040,1475 2061.4,1453.6 2061.4,1234.4 2044.42,1217.42 2044.42,966.58 2149.7,861.3 2225.58,861.3 2239.28,875 2425,875 2460.87,910.87 2465.36,910.87
  BOTTOM w4.4: J2.20@460,1920 505,1875 505,1780 618,1667 1293,1667 1310,1650 1414.2,1650 v1(1423.2,1659) 1434.38,1670.18 1536.62,1670.18 v1(1549.2,1657.6) 1555.8,1651 1749,1651 1783,1685 2030,1685 v2(2040,1675) 2048.4,1666.6 2316.93,1666.6 2351.48,1632.06 2491.2,1632.06 2504.09,1619.17 2551.58,1619.17 2588.94,1581.8 2659.37,1581.8 2672.57,1595 2856.06,1595 2873.26,1612.2 3269.8,1612.2 3288.19,1630.58 3504.42,1630.58 3518.89,1616.11 3920,1616.11 3952.11,1584 4111,1584 4225,1470 4324.76,1470 J12.3@4370,1515.24 ; R149.2@935,485 955,485 v1(985,455) 1027,455 1080.65,508.65 1507.69,508.65 1543.65,544.61 1543.65,712.17 1595,763.52 v1(1595,785)
P4_2/FC2_P2_UART_TXD_MCULINK: J1.4 R178.2 U1.T1 | length 2166.7
  TOP w4: 2465.32,870 U1.T1@2477.52,882.2
  TOP w4.4: J1.4@2117.5,1920 2065,1867.5 2065,1765 2023.8,1723.8 2023.8,1466.2 2043.2,1446.8 v1(2043.2,1335) 2043.2,1328.2 2034.42,1319.42 2034.42,905.58 2069.7,870.3 2091.95,870.3 2130.95,831.3 2238.01,831.3 2251.71,845 2440.32,845 2465.32,870
  BOTTOM w4.4: R178.2@1480,1235 1571.8,1326.8 2038.8,1326.8 2043.2,1331.2 v1(2043.2,1335)
P4_3/FC2_P3_UART_TXD_MCULINK: J1.2 R179.2 U1.U1 | length 2383.7
  TOP w4: 2457.5,842.5 U1.U1@2477.52,862.52
  TOP w4.4: v1(2013.2,1356.48) 2013.2,1321.8 2024.42,1310.58 2024.42,900.58 2064.7,860.3 2087.8,860.3 2126.8,821.3 2242.16,821.3 2255.86,835 2450,835 2457.5,842.5 ; v2(2183.66,1358.48) 2183.66,1523.66 2269,1609 2269,1865.8 2300,1896.8 2300,1930 2290,1940 2237.5,1940 J1.2@2217.5,1920
  BOTTOM w4.4: R179.2@1505,1390 1548.2,1346.8 2003.52,1346.8 v1(2013.2,1356.48) 2020.2,1363.48 2178.66,1363.48 v2(2183.66,1358.48)
P4_4/EZH_LCD_CS: J11.26 U1.M6 | length 2867.2
  TOP w4: v2(2574.78,981.85) 2575.94,980.68 U1.M6@2575.94,960.94
  TOP w4.4: J11.26@2765,1920 2765,1942.4 v2(2815,1992.4) ; v2(2967.6,2008.8) 2970,2006.4 3568.6,2006.4 3616,1959 3616,1795 3700,1711 3700,1624 3690,1614 3690,1480 3571,1361 v1(3571,1356)
  BOTTOM w4: v2(2574.78,981.85) 2577.93,985 2597.34,985 2610,997.66 2610,1030.2 2650,1070.2 2650,1094.13 2705,1149.13 2705,1205.86
  BOTTOM w4.4: 2705,1205.86 2757.05,1257.9 2828.88,1257.9 2873.97,1303 3192.8,1303 3206.4,1289.4 3378.54,1289.4 3408.14,1319 3470.71,1319 3507.71,1356 v1(3571,1356) ; v2(2815,1992.4) 2820.2,1987.2 2946,1987.2 v2(2967.6,2008.8)
P4_5/FXIO_LCD_GPIO: J12.6 SJ11.3 U1.M8 | length 2928.8
  TOP w4: v2(2614.26,981.84) 2615.31,980.79 U1.M8@2615.31,960.94
  TOP w4.4: 2962.21,1298.79 2962.21,1545.01 v1(2974,1556.8) ; 2962.23,1298.77 2962.23,1286.62 v2(2962.65,1286.2)
  BOTTOM w4: v2(2614.26,981.84) 2620,987.56 2620,1028.89 2660,1068.89 2660,1092.82 2715,1147.82 2715,1195
  BOTTOM w4.4: SJ11.3@2303.5,1585 2304.5,1585 2309.5,1580 2415,1580 2447.6,1547.4 2506.81,1547.4 2535.16,1519.05 2699.01,1519.05 2724.97,1545 2962.2,1545 v1(2974,1556.8) 2989.4,1572.2 3286.38,1572.2 3292.36,1578.18 3681.82,1578.18 3693.2,1566.8 4093.2,1566.8 4244.76,1415.24 J12.6@4270,1415.24 ; 2715,1195 2764.98,1244.98 2830.09,1244.98 2878.12,1293 2955.85,1293 v2(2962.65,1286.2)
P4_6/FXIO_LCD_INT: J12.5 U1.N7 | length 2534.8
  TOP w4: v2(2576.26,941.26) U1.N7@2595.63,941.26
  TOP w4.4: v1(4200.8,799) 4210.8,809 4210.8,1345.8 4225,1360 4314.76,1360 J12.5@4370,1415.24
  BOTTOM w4: v2(2576.26,941.26) 2576.26,940.51 2615.88,900.89 2625.91,900.89 2651,875.8
  BOTTOM w4.4: 2651,875.8 2651,849 2685.3,814.7 2741.93,814.7 2806.63,750 3045,750 3085,790 3133.05,790 3156.25,766.8 3461.8,766.8 3481.95,786.95 3746.03,786.95 3777.22,818.13 4183.87,818.13 4200.8,801.2 v1(4200.8,799)
P4_7/FXIO_LCD_RST: J12.7 U1.T4 | length 4147
  TOP w4: 2504.5,829.04 2517.7,842.24 2524.89,859.59 2524.89,870.52 U1.T4@2536.57,882.2
  TOP w4.4: v1(1930,1575) 1955,1600 1965,1600 1975,1590 1975,1290 1994.42,1270.58 1994.42,860.58 2051.1,803.9 2087.54,803.9 2110.14,781.3 2296.3,781.3 2310,795 2472.58,795 2504.5,826.92 2504.5,829.04
  BOTTOM w4.4: v1(1930,1575) 1995,1510 2110,1510 2127.08,1527.08 2178.79,1527.08 2192.71,1541 2389,1541 2415,1515 2494.59,1515 2521.25,1488.33 2748.14,1488.33 2764.61,1504.8 3020.2,1504.8 3049,1476 3282.6,1476 3290,1483.4 3290,1530 3325,1565 3676.71,1565 3695,1546.71 3695,1490 3720,1465 3765,1465 3790,1440 4090,1440 4155,1375 4310.24,1375 J12.7@4370,1315.24
P4_12/FXIO_D20: J12.17 R187.1 U1.T6 | length 4580.9
  TOP w4: 2477.48,774 2544,774 2587.61,817.61 2587.61,870.53 U1.T6@2575.94,882.2
  TOP w4.4: v1(2045,784.7) 2062.2,767.5 2087.9,767.5 2094.1,761.3 2305.44,761.3 2318.14,774 2477.48,774 ; v1(3510,185) 3680,355 4020,355 4160,495 4160,645 4184.35,669.36 4306.35,669.36 4322,685 4322,767.24 J12.17@4370,815.24
  BOTTOM w4.4: R187.1@1810,620 1810,683.51 1921.43,794.94 2034.76,794.94 v1(2045,784.7) 2045,785 2065,805 2086.44,805 2098.2,793.24 2098.2,743.24 2118.2,723.24 2118.2,248.23 2158.23,208.2 2204.94,208.2 2290,123.14 2290,1.71 2329.21,-37.5 2972.64,-37.5 3046,35.86 3046,84 3157,195 3500,195 v1(3510,185)
P4_13/FXIO_D21: J12.18 SJ2.3 SJ10.1 U1.T7 | length 3745.8
  TOP w4: 2595.61,810.61 U1.T7@2595.63,882.2
  TOP w4.4: v1(1956.8,1575) 1965,1566.8 1965,1275 1984.42,1255.58 1984.42,814.6 2045.83,753.2 2088.24,753.2 2115.74,725.7 v1(2349.3,725.7) 2360.4,736.8 2431.8,736.8 2459,764 2549,764 2595.61,810.61
  BOTTOM w4.4: SJ2.3@1948.5,1610 1948.5,1583.3 v1(1956.8,1575) 2011.8,1520 2095,1520 2105,1530 SJ10.1@2105,1550 ; v1(2349.3,725.7) 2358.3,734.7 3049.7,734.7 3067.66,752.65 3462.66,752.65 3485.42,775.42 3751.48,775.42 3782.19,806.13 3956.37,806.13 3990,772.5 4227.27,772.5 J12.18@4270,815.24
P4_14/FXIO_D22: J12.19 U1.N8 | length 2069
  TOP w4: v2(2595.4,959.8) 2595.48,959.72 2596.85,959.72 U1.N8@2615.31,941.26
  BOTTOM w4: v2(2595.4,959.8) 2596.57,959.8 2629,927.37 2629,911 2665,875
  BOTTOM w4.4: 2665,875 2665,850 2690.3,824.7 2746.08,824.7 2808.77,762 3042,762 3080,800 3137.2,800 3160.39,776.8 3456.8,776.8 3478.47,798.47 3740.59,798.47 3772.24,830.13 4175.01,830.13 4204.88,860 4295,860 4320,835 4320,765.24 J12.19@4370,715.24
P4_15/FXIO_D23: J12.20 U1.T8 | length 2219.9
  TOP w4: 2604.61,803.47 2604.61,871.5 U1.T8@2615.31,882.2
  TOP w4.4: v2(2420,715) 2425,715 2464.3,754.3 2555.44,754.3 2604.61,803.47
  BOTTOM w4.4: v2(2420,715) 2429.7,724.7 3060.7,724.7 3078.65,742.65 3468.65,742.65 3489.89,763.89 3756.92,763.89 3787.16,794.13 3953.37,794.13 3986.16,761.34 4152.81,761.34 4198.91,715.24 J12.20@4270,715.24
P4_16/FXIO_D24: J12.21 R34.1 R180.1 U1.R8 | length 3545.3
  TOP w4: U1.R8@2615.31,901.89 2626.01,891.19 2626.01,818.65 2625.69,818.33
  TOP w4.4: R34.1@1765,750 1783.6,768.6 1842.86,768.6 1855.46,756 1871.07,756 1890.07,775 1927.5,775 v1(1946.76,755.74) 1949.3,753.2 1949.3,685.7 1958.2,676.8 1975.04,676.8 1985.04,686.8 2063.2,686.8 2072.5,677.5 2444.59,677.5 v2(2451.79,684.7) 2501.79,734.7 2564.7,734.7 2625.69,795.69 2625.69,818.33
  BOTTOM w4.4: R180.1@1915,420 1915,430 1870,475 1870,682.5 1943.24,755.74 v1(1946.76,755.74) ; v2(2451.79,684.7) 2481.79,714.7 3064.84,714.7 3082.8,732.65 3472.8,732.65 3492.51,752.36 3762.36,752.36 3792.13,782.13 3940.37,782.13 3972.32,750.17 4140.5,750.17 4225.67,665 4320.24,665 J12.21@4370,615.24
P4_17/FXIO_D25: J12.22 R28.1 U1.R9 | length 2842.3
  TOP w4: U1.R9@2635,901.89 2635.19,901.7 2635.19,813.31 2636.69,811.81
  TOP w4.4: R28.1@1905,750 1925,750 1935,740 1935,680 1950,665 1981,665 1991,675 2050,675 2057.5,667.5 2457.5,667.5 v2(2475,685) 2514.7,724.7 2573.13,724.7 2636.69,788.26 2636.69,811.81
  BOTTOM w4.4: v2(2475,685) 2494.7,704.7 3068.99,704.7 3086.94,722.65 3476.94,722.65 3493.3,739.01 4128.19,739.01 4251.97,615.24 J12.22@4270,615.24
P4_18/FXIO_D26: J12.23 U1.N10 | length 2287.2
  TOP w4: v2(2636.22,940.15) 2637.33,941.26 U1.N10@2654.69,941.26
  BOTTOM w4: v2(2636.22,940.15) 2656.53,940.15 2702.63,894.06 2742.65,894.06
  BOTTOM w4.4: 2742.65,894.06 2854.21,782.5 3006.76,782.5 3044.26,820 3131.34,820 3164.54,786.8 3451.8,786.8 3475,810 3735.15,810 3767.27,842.13 4172.87,842.13 4200.74,870 4400,870 4410,860 4410,555.24 J12.23@4370,515.24
P4_19/FXIO_D27: J12.24 U1.R10 | length 2226
  TOP w4: 2646.94,805.92 2646.94,848.06 2643.19,851.81 2643.19,890.39 U1.R10@2654.69,901.89
  TOP w4.4: v2(2498,685) 2527.7,714.7 2577.27,714.7 2646.69,784.12 2646.69,805.66 2646.94,805.92
  BOTTOM w4.4: v2(2498,685) 2507.7,694.7 3073.13,694.7 3091.08,712.65 3481.08,712.65 3496.28,727.85 4115.89,727.85 4205,638.74 4205,580.24 J12.24@4270,515.24
P4_20/FXIO_D28: J12.25 R182.1 U1.T10 | length 3319.4
  TOP w4: U1.T10@2654.69,882.2 2666.19,870.7 2666.19,829.3 2670,825.49 2670,779.14
  TOP w4.4: v1(1999.63,656.8) 2027.93,628.5 2058.5,628.5 2077.5,647.5 2513.5,647.5 2544.02,678.02 v2(2544.98,678.02) 2561.65,694.7 2585.56,694.7 2670,779.14
  BOTTOM w4.4: v1(1999.63,656.8) 1985,642.17 1985,470 2030,425 R182.1@2030,420 ; v2(2544.98,678.02) 2561.49,661.51 2638.49,661.51 2738.2,561.8 2968.51,561.8 3099.37,692.65 3489.37,692.65 3502.24,705.52 4091.27,705.52 4175,621.8 4175,435 4245,365 4319.76,365 J12.25@4370,415.24
P4_21/FXIO_D29: J12.26 U1.T11 | length 2268.7
  TOP w4: U1.T11@2674.37,882.2 2674.37,851.63 2675.19,850.81 2675.19,831.61 2680,826.8 2680,785.56
  TOP w4.4: v2(2569.5,678.5) 2583.5,678.5 2680,775 2680,785.56
  BOTTOM w4.4: v2(2569.5,678.5) 2573,675 2640,675 2743.2,571.8 2964.37,571.8 3095.23,702.65 3485.23,702.65 3499.26,716.69 4103.58,716.69 4195,625.27 4195,490.24 J12.26@4270,415.24
P4_22/FXIO_D30: J12.27 U1.T12 | length 2528.1
  TOP w4: 2685.69,834.31 2685.69,853.31 2682.56,856.44 2682.56,870.7 U1.T12@2694.06,882.2
  TOP w4.4: v2(2569.99,645) 2575.78,650.8 2575.78,652.02 2690,766.23 2690,830 2685.69,834.31
  BOTTOM w4.4: v2(2569.99,645) 2569.99,644.39 2586.43,627.95 2642.05,627.95 2728.2,541.8 2976.8,541.8 3107.66,672.65 3497.66,672.65 3508.2,683.2 4066.66,683.2 4155,594.86 4155,360 4250,265 4319.76,265 J12.27@4370,315.24
P4_23/FXIO_D31: J12.28 U1.U12 | length 2307.4
  TOP w4: U1.U12@2694.06,862.52 2694.06,845.94 2700,840
  TOP w4.4: v2(2591.99,645.31) 2700,753.32 2700,840
  BOTTOM w4.4: v2(2591.99,645.31) 2640.55,645.31 2734.06,551.8 2972.66,551.8 3103.51,682.65 3493.51,682.65 3505.22,694.36 4078.97,694.36 4165,608.33 4165,420.24 J12.28@4270,315.24
P5-9V_VIN: C72.1 C73.1 C74.1 J3.16 J15.1 | length 285
  TOP w20: 1364,402.5 J15.1@1404,402.5 ; 1404,362.5 J15.1@1404,402.5 ; 1444,402.5 J15.1@1404,402.5
  BOTTOM w20: 1404,362.5 J15.1@1404,402.5 1444,402.5 ; 1473,20.5 J3.16@1515.5,20.5 1515.5,63
P5_2/MC_BEMF_B: R197.1 U1.M10 | length 2002.9
  TOP w4: v2(2636.11,961.15) 2639.11,961.15 2639.33,960.94 U1.M10@2654.69,960.94
  TOP w4.4: v1(3500,848.2) 3512.46,860.66 3512.46,1380.54 3600.34,1468.43 3600.34,1669.08 v1(3611.99,1680.73)
  BOTTOM w4: v2(2636.11,961.15) 2648.84,961.15 2707.74,902.26 2748.6,902.26
  BOTTOM w4.4: 2748.6,902.26 2858.36,792.5 3002.62,792.5 3040.12,830 3135.48,830 3160.48,805 3265,805 3290,830 3481.8,830 v1(3500,848.2) ; v1(3611.99,1680.73) 3622.46,1691.2 3699.8,1691.2 R197.1@3725,1666
P5_3/MC_BEMF_C: R196.1 U1.N11 | length 4184.2
  TOP w4: v2(2673.37,960.94) 2674.37,959.94 U1.N11@2674.37,941.26
  TOP w4.4: v2(3467.46,1604.38) 3490.34,1581.5 3490.34,1485.34 3472.46,1467.46 3472.46,968.94 3456.06,952.54 3456.06,862.14 v1(3470,848.2)
  BOTTOM w4: v2(2673.37,960.94) 2693.91,960.94 2719.85,935
  BOTTOM w4.4: R196.1@1105,1565 1105,1599 1144.2,1638.2 1204.8,1638.2 1229.8,1613.2 1372.54,1613.2 1412.14,1573.6 1758.63,1573.6 1820.03,1635 1975,1635 2009.8,1600.2 2152,1600.2 2152.2,1600 2185,1600 2197.2,1612.2 2312.8,1612.2 2332.94,1592.06 2474.62,1592.06 2489.28,1577.4 2519.24,1577.4 2544.84,1551.8 2671.8,1551.8 2685,1565 2935.12,1565 2962.32,1592.2 3278.09,1592.2 3287.97,1602.08 3465.16,1602.08 v2(3467.46,1604.38) ; 2719.85,935 2775,935 2779.7,939.7 3140.3,939.7 3160,920 3235,920 3306.8,848.2 v1(3470,848.2)
P5_4/MC_VOLT_DCB: J2.7 U1.M12 | length 4301.5
  TOP w4: U1.M12@2694.06,960.94 v2(2694.06,980.63)
  TOP w4.4: v1(3485,884.6) 3502.46,902.06 3502.46,1384.69 3590.34,1472.57 3590.34,1670.81 v1(3580.05,1681.1)
  BOTTOM w4: v2(2694.06,980.63) 2698.69,976 2724,976 2748.4,951.6 2766.6,951.6 2774.7,959.7
  BOTTOM w4.4: J2.7@1060,1820 1095,1820 1159.8,1755.2 2077.37,1755.2 2105.97,1726.6 2353.4,1726.6 2387.94,1692.06 2560.98,1692.06 2570.84,1682.2 2759.51,1682.2 2774.11,1667.6 2829.66,1667.6 2849.86,1687.8 3213.69,1687.8 3220.49,1694.6 3566.55,1694.6 v1(3580.05,1681.1) ; 2774.7,959.7 3150.3,959.7 3170,940 3255,940 3295,900 3365,900 3380.4,884.6 v1(3485,884.6)
P5_5/MC_CUR_DCB: R195.3 U1.K12 | length 2611.6
  TOP w4: v2(2673.17,999.56) 2675.44,999.56 2676.19,1000.31 U1.K12@2694.06,1000.31
  TOP w4.4: v1(3227.73,970) 3270,1012.27 3270,1230 3250,1250 v2(3250,1345.6)
  BOTTOM w4: v2(2673.17,999.56) 2695.44,999.56 2710,985 2728.88,985 2748.88,965 2765,965 2770,970
  BOTTOM w4.4: R195.3@1725,1449 1749.7,1449 1758.9,1458.2 1876.8,1458.2 1910.32,1424.68 2211.08,1424.68 2233.36,1402.4 2389.57,1402.4 2410.19,1381.78 2440.55,1381.78 2456.4,1365.93 2657.74,1365.93 2702.12,1321.55 2819.12,1321.55 2850.57,1353 3242.6,1353 v2(3250,1345.6) ; 2770,970 3154.14,970 3174.14,950 3207.73,950 v1(3227.73,970)
P5_6/PMOD_RESET: SJ13.1 U1.K13 | length 1501.9
  TOP w4: v2(2692.74,1021.24) 2692.74,1019.71 2712.14,1000.31 U1.K13@2713.74,1000.31
  TOP w4.4: v1(3235,425) 3235,445 3390.04,600.04 3390.04,680 3436.06,726.02 3436.06,976.86 v1(3444.26,985.06)
  BOTTOM w4: v2(2692.74,1021.24) 2692.74,1017.26 2705,1005 2719.13,1005 2729.13,1015 2752.52,1015 2770.72,996.8 2846.8,996.8
  BOTTOM w4.4: 2846.8,996.8 2851.2,1001.2 3096.2,1001.2 3103.2,1008.2 3256.8,1008.2 3279.94,985.06 v1(3444.26,985.06) ; SJ13.1@3197,425 v1(3235,425)
P5_7/ME_INT: J14.2 R46.1 U1.L13 | length 6253.1
  TOP w4: U1.L13@2713.74,980.63 2713.74,961.95 v2(2714.74,960.95)
  TOP w4.4: v1(880,190) 890,200 960.74,200 980.74,220 1229,220 1248.27,200.73 1584.27,200.73 v1(1600,185) ; J14.2@3240.04,1520.11 3240.04,1444.96 3291.2,1393.8 3291.2,1268.8 3310,1250 v1(3310,876.59) ; v1(3470,135) 3488.2,153.2 3488.2,185.94 3450,224.14 3450,510 3505,565 3675,565 3695,585 3695,655.86 3749.14,710 3880,710 3895,725 3895,826 v1(3931,862)
  BOTTOM w4: v2(2714.74,960.95) 2714.74,959.95 2731.29,943.4
  BOTTOM w4.4: v1(880,190) R46.1@880,310 ; v1(1600,185) 1600,-32 1635.5,-67.5 3017.5,-67.5 3084.49,-0.51 3084.49,87.5 3172,175 3430,175 v1(3470,135) ; 2731.29,943.4 2770,943.4 2776.3,949.7 3145.3,949.7 3165,930 3240,930 3293.41,876.59 v1(3310,876.59) 3320.19,866.4 3536.4,866.4 3578,908 3866,908 3912,862 v1(3931,862)
P5_8: J11.31 U1.L14 | length 2729.2
  TOP w4: v2(2733.24,999.31) 2733.43,999.12 U1.L14@2733.43,980.63
  TOP w4.4: J11.31@2465,1820 2465,1754.31 v1(2489.05,1730.26) ; v1(3474.26,945) 3482.46,953.2 3482.46,1457.46 3500.34,1475.34 v1(3500.34,1752.8)
  BOTTOM w4: v2(2733.24,999.31) 2755.69,999.31 2766.4,988.6 2850.48,988.6 2853.08,991.2
  BOTTOM w4.4: v1(2489.05,1730.26) 2497.4,1738.6 3190.65,1738.6 3204.85,1752.8 v1(3500.34,1752.8) ; 2853.08,991.2 3156.2,991.2 3163.2,998.2 3246.8,998.2 3300,945 v1(3474.26,945)
P5_9: J11.29 U1.M14 | length 2766.8
  TOP w4: U1.M14@2733.47,960.94 2751.93,979.4 v2(2754.28,979.4)
  TOP w4.4: J11.29@2565,1820 2565,1742.06 v1(2586.66,1720.4) ; v1(3484.26,915) 3492.46,923.2 3492.46,1392.46 3580.34,1480.34 3580.34,1653.59 3561.8,1672.13 v1(3561.8,1747.14)
  BOTTOM w4.4: v1(2586.66,1720.4) 2594.06,1727.8 3194,1727.8 3200.8,1734.6 3549.26,1734.6 v1(3561.8,1747.14) ; v2(2754.28,979.4) 2755.27,980.4 3160.4,980.4 3168.2,988.2 3236.8,988.2 3310,915 v1(3484.26,915)
P5V0: C33.1 C34.1 C37.1 C38.1 C71.1 D3.C D4.C D6.C J3.10 J10.3 J14.7 R199.1 U2.1 U2.4 U3.B1 U3.B2 U3.C1 | length 5160.2
  TOP w10: U3.C1@1819.25,592.13 1782.87,592.13 1775,600 1782.87,607.87 U3.B1@1819.25,607.87 U3.B2@1835,607.87
  TOP w15: 1690,250 1690,384.1 1705,399.1 U2.1@1735.9,399.1
  TOP w20: 465.5,20.5 J10.3@515.5,20.5 515.5,-29.5 ; v1(1650,480) v1(1690,480) 2025,480 2132.25,587.25 v1(2565,587.25) ; v1(1650,580) 1655,575 C37.1@1695,575 1730,575 1740,585 C38.1@1745,590 1765,590 1775,600 ; J14.7@3740.04,1520.11 3770,1550.06 C71.1@3770,1645 ; v1(4050,580) 4096.2,626.2 4096.2,743.03 4193,839.83 4193,1392 v1(4150,1435)
  POWER w20: 465.5,20.5 J10.3@515.5,20.5 515.5,-29.5 ; 1173,20.5 J3.10@1215.5,20.5 ; 1215.5,-22 J3.10@1215.5,20.5 ; 1215.5,63 J3.10@1215.5,20.5 ; 1258,20.5 J3.10@1215.5,20.5
  BOTTOM w15: 1685,585 1685,670 1745.3,730.3 1745.3,800.3 1760,815 1785,815 1800,830 R199.1@1800,870
  BOTTOM w20: v1(2565,587.25) 2578.38,573.87 2668.95,573.87 2718.83,524 3029,524 3065,560 3901,560 3921,580 v1(4050,580) ; J14.7@3740.04,1520.11 3740.04,1519.96 3800,1460 4125,1460 v1(4150,1435)
  other v1: 415,20 415,70 415,120 415,170 1900,225 1945,225 1610.63,230 1640,230 490,1370 530,1370 490,1405 530,1405
P5V0_MCU_LINK_USB: J17.A4 J17.A9 J17.B4 J17.B9 L6.1 U12.6 | length 357.8
  BOTTOM w30: J17.A4@92.72,1660.66 J17.B9@39.57,1660.66 15.66,1660.66 -2.55,1642.45 -2.55,1514.55 18.66,1493.34 J17.B4@39.57,1493.34 J17.A9@92.72,1493.34 115.72,1493.34
  other v1: 170,1480 170,1510
P5V_HDR_IN: C75.1 D6.A J15.3 | length 120
  TOP w20: 1564,402.5 J15.3@1604,402.5 ; 1604,362.5 J15.3@1604,402.5 ; 1644,402.5 J15.3@1604,402.5
P5V_MCU_LINK_USB: C78.1 D3.A L6.2 R106.1 | length 310.9
  TOP w15: D3.A@355.79,1385 355.79,1360.71 371.5,1345 575,1345 601.9,1371.9 R106.1@624.7,1371.9
P5V_USB_HS: C39.1 D4.A L3.2 R27.1 U3.C2 U3.D1 U3.D2 | length 2025.5
  TOP w10: U3.D1@1819.25,576.38 U3.D2@1835,576.38 ; 1835,550 U3.D2@1835,576.38 ; U3.C2@1835,592.13 U3.D2@1835,576.38
  TOP w15: 1790,550 1835,550 R27.1@1965,550
  TOP w20: v1(475,415) 496,394 627.77,394 647.77,374 647.77,294.23 688.77,253.23 863.23,253.23 885,275 1186,275 1280,369 1280,450 1330,500 1520,500 1560,540 1780,540 1790,550
  BOTTOM w20: v1(325,310) 370,310 v1(475,415)
RESET_B: C5.1 D1.C D16.1 J3.6 J23.10 R3.2 R61.1 R132.2 R146.2 SW3.3 SW3.4 U1.F3 | length 8563.3
  TOP w4: v2(2516.89,1060) U1.F3@2516.89,1079.06
  TOP w4.4: v1(-60,1930) -40,1950 -40,1988.66 -29.33,1999.33 SW3.3@12.68,1999.33 SW3.4@12.68,1835.94 ; R132.2@1255,1565 1280,1565 1285,1570 v1(1285,1631.4) ; v1(1461,844) 1477.7,827.3 1477.7,707.3 1537.5,647.5 v1(1607.8,647.5) ; D1.C@1660,1628.35 1660,1599 v1(1664,1595) 1664,1519 1646.8,1501.8 1646.8,1448.8 1593.2,1395.2 1593.2,1200 1603.2,1190 J23.10@1625,1190 1625,1135 v1(1660,1100) R146.2@1660,1065 1660.59,1065.59 D16.1@1717.28,1065.59 ; v1(3833,1345) 3905,1417 v1(3905,1590)
  BOTTOM w4.4: v1(-60,1930) R3.2@-25,1930 C5.1@-25,1885 -25,1815 -5,1795 340,1795 382.07,1752.93 498.07,1752.93 594,1657 1212,1657 1244,1625 1278.6,1625 v1(1285,1631.4) 1291.4,1625 1385,1625 1426.4,1583.6 1652.6,1583.6 v1(1664,1595) 1762,1595 1812,1645 1985,1645 2019.8,1610.2 2181.06,1610.2 2193.06,1622.2 2318.9,1622.2 2339.05,1602.06 2478.76,1602.06 2493.42,1587.4 2523.38,1587.4 2548.98,1561.8 2667.66,1561.8 2680.86,1575 2925,1575 2952.2,1602.2 3273.95,1602.2 3292.33,1620.58 3499.42,1620.58 3516.8,1603.2 3891.8,1603.2 v1(3905,1590) ; J3.6@1015.5,20.5 1065,70 1248,70 1265,87 1265,156 1325,216 1325,427 1341,443 1537.26,443 1607.8,513.54 v1(1607.8,647.5) ; v1(1461,844) 1490,873 1490,940 1650,1100 v1(1660,1100) 1678.2,1081.8 1791.06,1081.8 1817.46,1108.2 1845.2,1108.2 1880,1143 1880,1186.76 1949.24,1256 2096.86,1256 2112.86,1272 2295.57,1272 2310.22,1257.35 2357.84,1257.35 2366.67,1248.52 2366.67,1116.66 2413.33,1070 2506.89,1070 v2(2516.89,1060) ; v1(3833,1345) R61.1@3870,1345
USB_OTG_VBUS_5V: J6.A4 J6.A9 J6.B4 J6.B9 L3.1 R35.1 U4.6 | length 984.1
  TOP w20: v1(560,520) 685,520 715,490 v1(715,488.06)
  TOP w30: J6.A9@92.72,240.69 133.22,240.69 v1(145.18,252.66)
  POWER w30: 9.31,240.69 J6.B4@39.57,240.69 J6.A9@92.72,240.69 133.22,240.69 v1(145.18,252.66) ; 13.02,408.02 J6.B9@39.57,408.02 J6.A4@92.72,408.02
  BOTTOM w12: 284.92,314.92 U4.6@284.92,350.31 320,350.31
  BOTTOM w20: v1(176.68,284.16) 254.16,284.16 284.92,314.92 ; 320,350.31 345.31,350.31 475,480 520,480 v1(560,520) ; R35.1@715,453 v1(715,488.06)
  other v1: 176.68,252.66 145.18,284.16
VDD_ANA: C20.1 C69.1 J2.16 L1.2 R171.1 U1.R4 | length 2838.7
  TOP w8: v2(2525,819.75) 2531.95,819.75 2551,838.8 2551,887.46 U1.R4@2536.57,901.89
  TOP w20: J2.16@660,1920 710,1870 710,1790 734,1766 1119,1766 v1(1120,1765)
  POWER w20: v1(1120,1765) 1225,1660 1225,1445 1266,1404 1336,1404 1385,1355 1805,1355 1875,1285 1950,1285 1990,1245 2100,1245 2525,820 v2(2525,819.75)
  BOTTOM w20: L1.2@2390,825 2395,830 R171.1@2440,830 2449,821 2523.75,821 v2(2525,819.75) 2563.75,819.75 C69.1@2570,826 2570,865 C20.1@2580,875
VDD_BAT: C31.1 J27.2 R15.2 U1.T17 | length 277.8
  TOP w10: U1.T17@2792.48,882.2 2802.8,882.2 v2(2810,875)
  TOP w20: v1(2880,814) 2880,805 2892.5,792.5 2892.5,753.46 2940.96,705 R15.2@2960,705
  BOTTOM w15: v2(2810,875) 2825,860 C31.1@2835,860 2835,845 2866,814 v1(2880,814)
VDD_CORE: C21.1 C22.1 C23.1 R18.2 R19.2 U1.K10 U1.L11 | length 349.4
  TOP w10: U1.K10@2654.69,1000.31 v2(2654.69,980.44) 2654.88,980.63 U1.L11@2674.37,980.63
  TOP w20: v1(3124.57,899.57) 3145,879.14 R18.2@3145,865
  BOTTOM w12: C23.1@2780,1025 C22.1@2820,1025 2913,1025 2925,1037 C21.1@2925,1058 2940.78,1058 2952.78,1046 v1(2952.78,1029.4)
  BOTTOM w20: v1(3124.57,899.57) 3139.14,885 R19.2@3165,885
VDD_CORE_SYS: J28.2 R14.1 R16.2 R20.1 R22.1 | length 480.8
  TOP w12: v1(3185,825) 3205,845 R20.1@3205,865 3205,890 3215,900 3245,900 3265,920 R22.1@3265,940
  BOTTOM w20: J28.2@2760,415 2815,415 R16.2@2880,350 ; R14.1@3060,915 3075,915 3100,890 3100,880 3132.2,847.8 3151.24,847.8 3151.43,847.6 3162.4,847.6 v1(3185,825)
VDD_DCDC: C28.1 R14.2 R194.1 U1.R15 | length 280.6
  TOP w10: U1.R15@2753.11,901.89 v2(2772.8,901.89)
  TOP w20: C28.1@2990,770 v1(2990,815)
  BOTTOM w15: v2(2772.8,901.89) 2772.8,907.79 2790.01,925 2875,925 R194.1@2885,915
  BOTTOM w20: v1(2990,815) 2999.94,815 3039.94,855 R14.2@3060,855
VDD_IO_USB: C29.1 J25.2 R8.1 R9.1 R10.1 R11.1 R151.2 U1.R12 | length 437.9
  TOP w10: v2(2675,901.89) U1.R12@2694.06,901.89
  BOTTOM w12: v2(2675,901.89) 2700,877.24 C29.1@2700,865
  BOTTOM w20: R8.1@2295,863 2265,833 R10.1@2265,805 2265,773.23 2394.12,644.11 ; v2(2403.24,1184.63) 2422.87,1165 R11.1@2435,1165 ; R9.1@3015,1170 3023.8,1161.2 3047.4,1161.2 v1(3055,1153.6)
  other v1: 2609.12,495.14 2636.12,495.14 2664.12,495.14
VDD_LDO_CORE_IN: C30.1 R19.1 R20.2 U1.K6 | length 244.2
  TOP w10: U1.K6@2575.94,1000.31 2575.94,1015.94 2577.26,1017.26 v2(2577.26,1020)
  TOP w12: v1(3230,825) 3235,825 3265,855 R20.2@3265,865
  BOTTOM w12: C30.1@2506,1093 2509.35,1093 2577.26,1025.09 v2(2577.26,1020)
  BOTTOM w20: R19.1@3225,885 3225,830 v1(3230,825)
VDD_LDO_SYS_IN: C32.1 R22.2 R23.1 U1.P15 | length 490.2
  TOP w4: U1.P15@2753.11,921.57 2764.11,932.57 2825,932.57
  TOP w4.4: 2825,932.57 2832.07,925.5
  TOP w12: 2832.07,925.5 3065.5,925.5 R23.1@3070,930 3110,930 C32.1@3120,940 3150,910 3175,910 R22.2@3205,940